# Altium PCB PCB.PcbDoc
Units mil, origin at the board's own origin, x right, y up, seen from the top; angles counter-clockwise.
Board outline 1968.5 x 2362.2 mil, 4 copper layers (Top Layer, Int1 (GND), Int2 (PWR), Bottom Layer), stack 61.811 mil thick; 15 components, 8 nets, 55 pads, 210 vias.
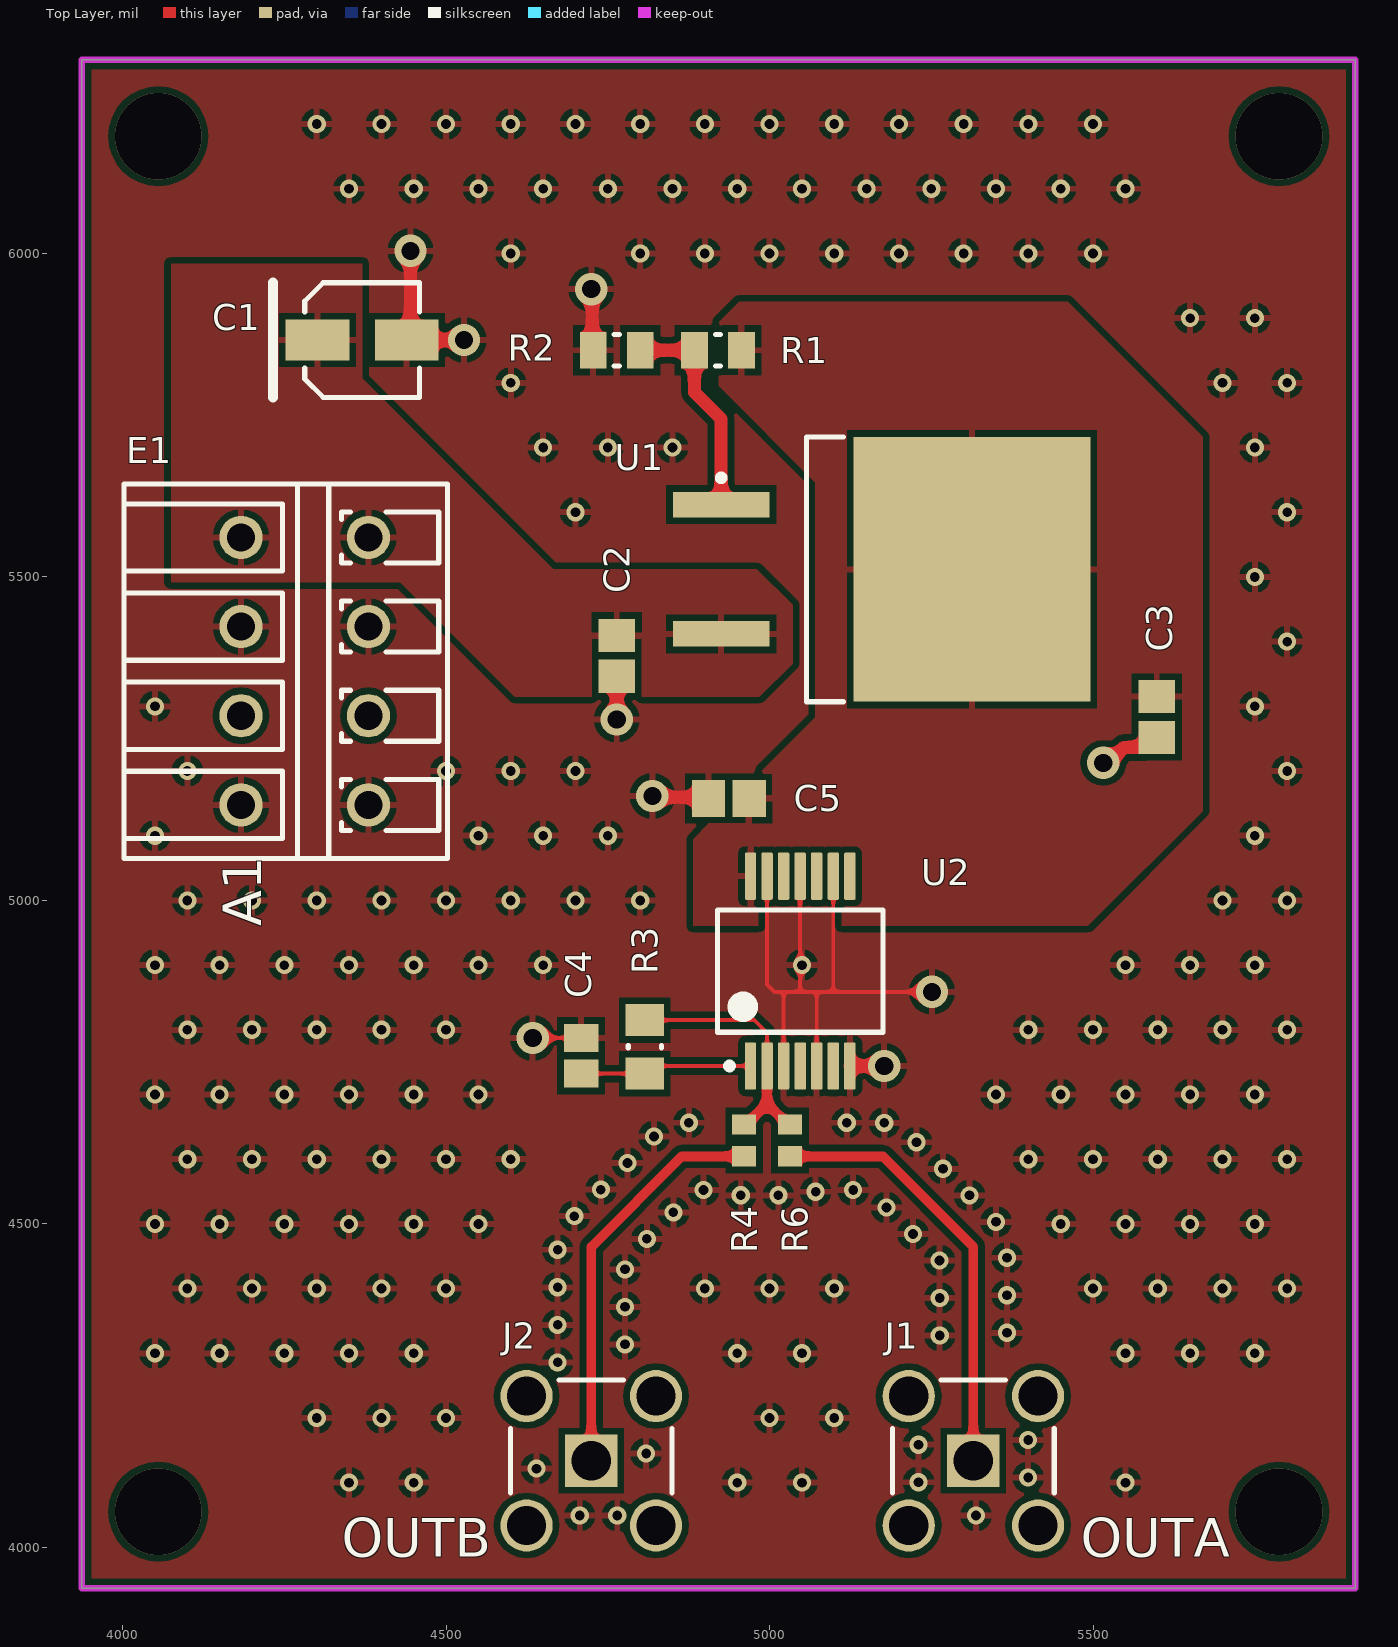
[diagram p0: Top Layer view]
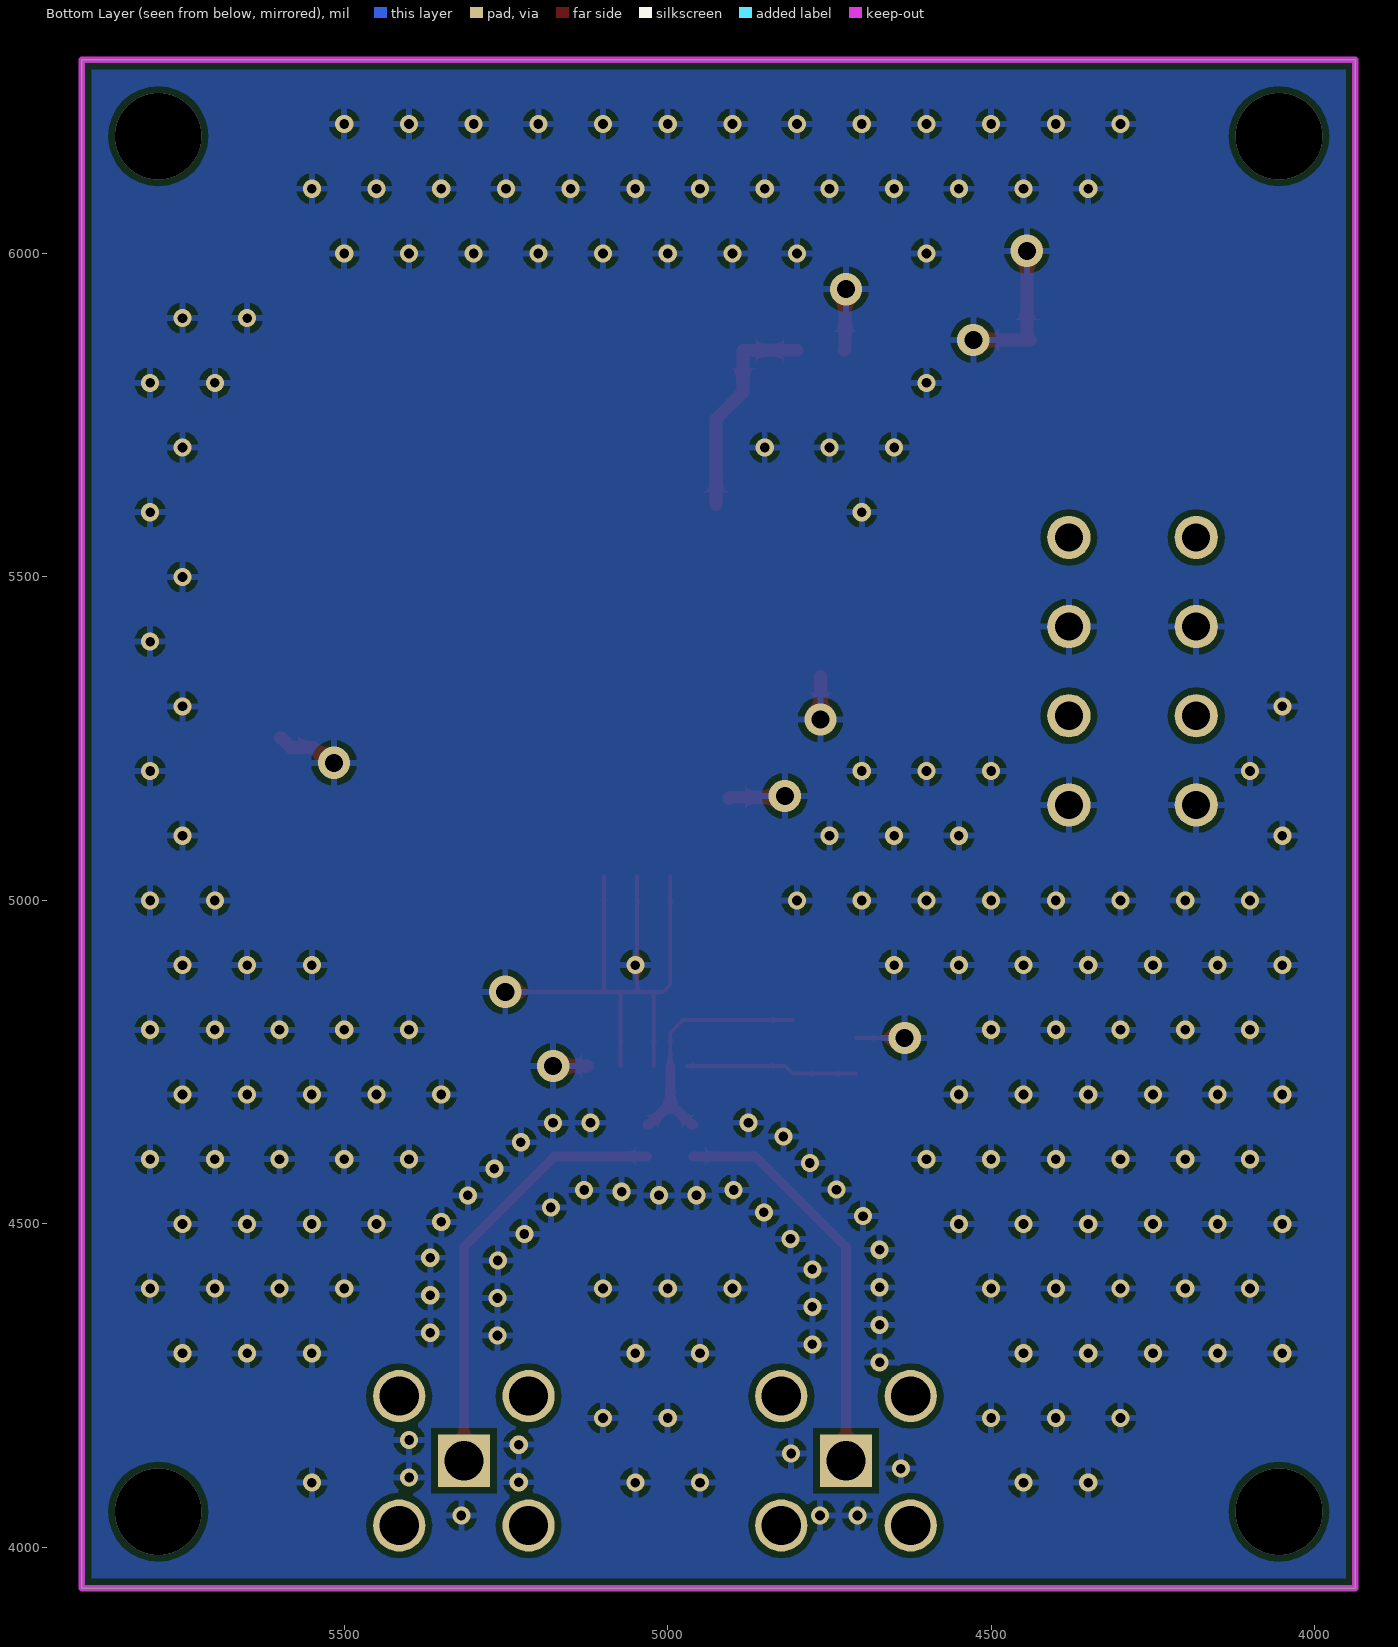
[diagram p1: Bottom Layer view, seen from below]
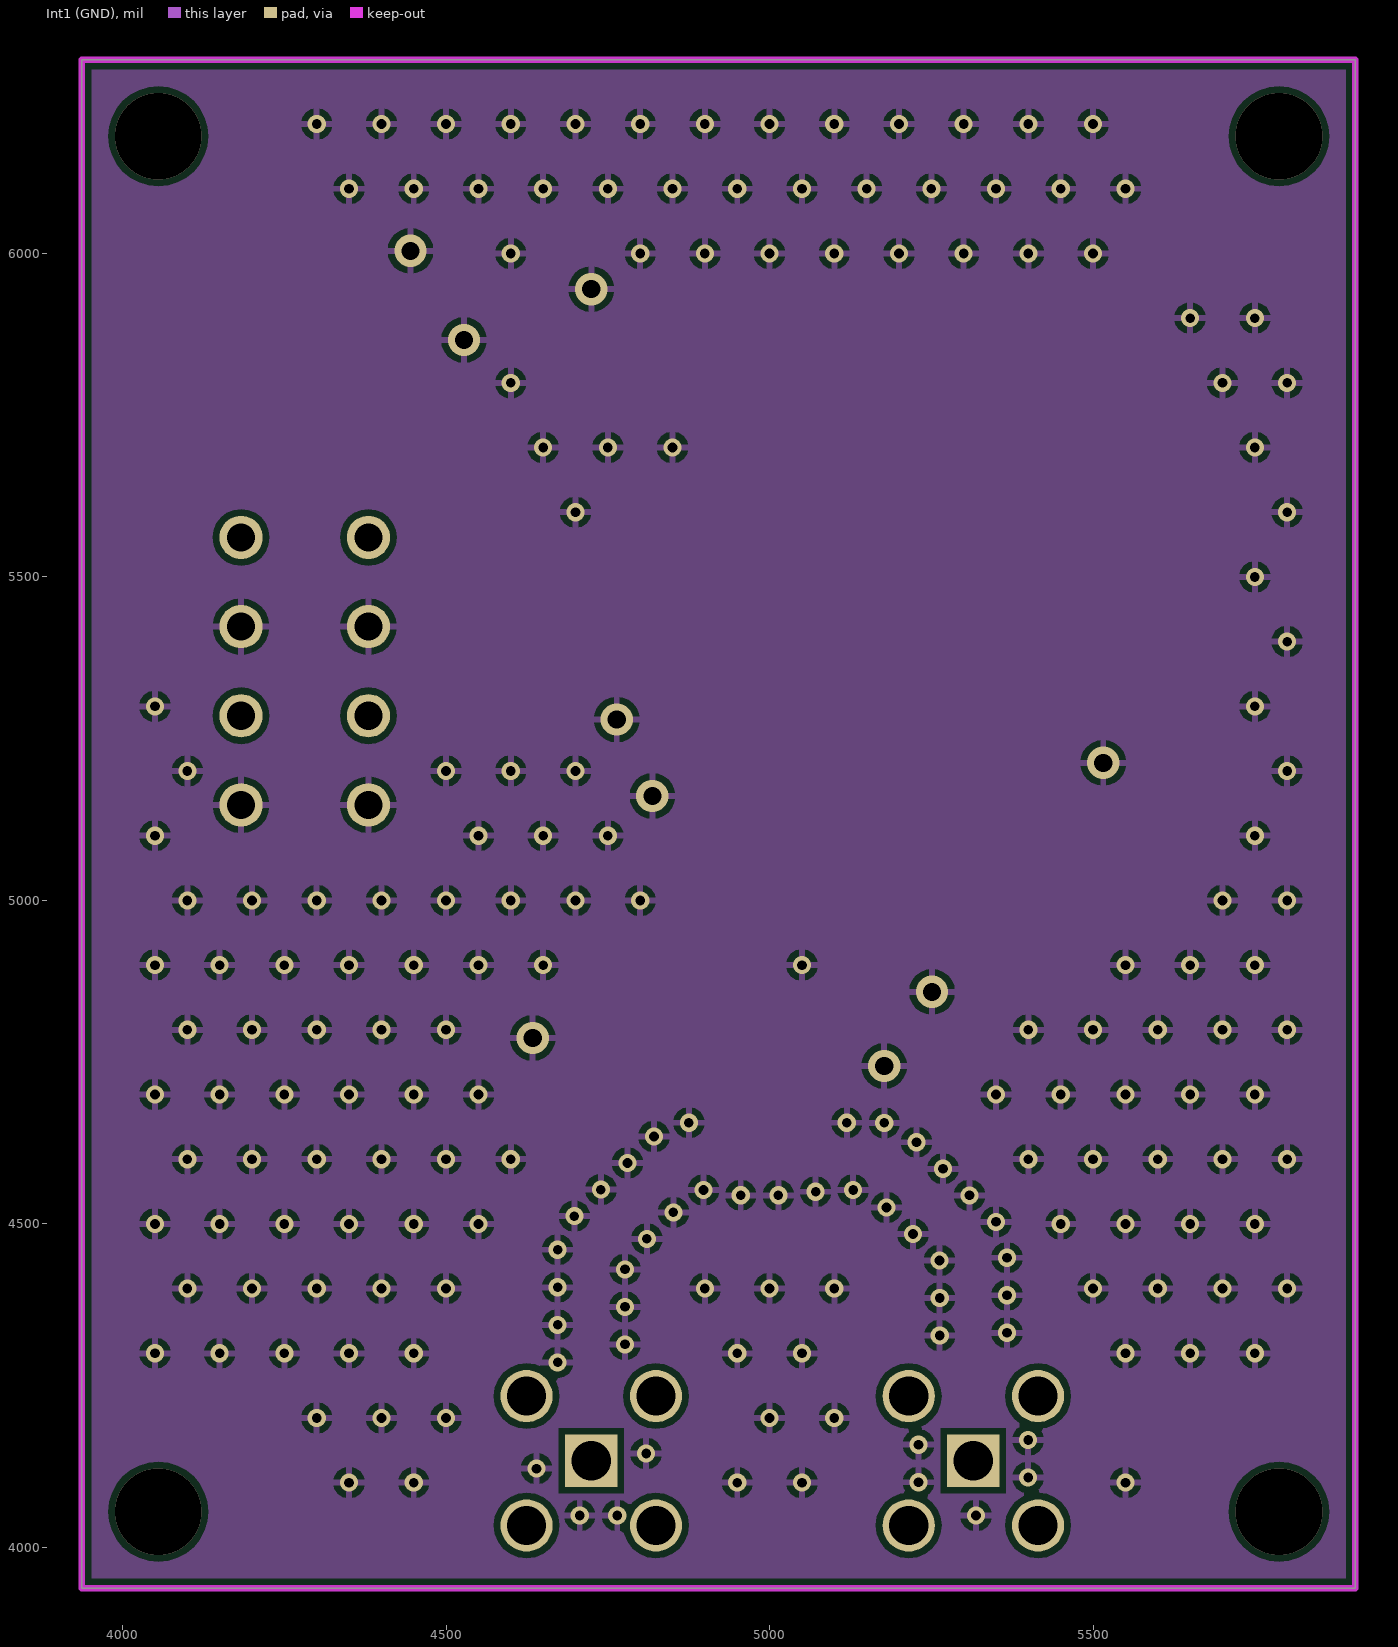
[diagram p2: Int1 (GND)]
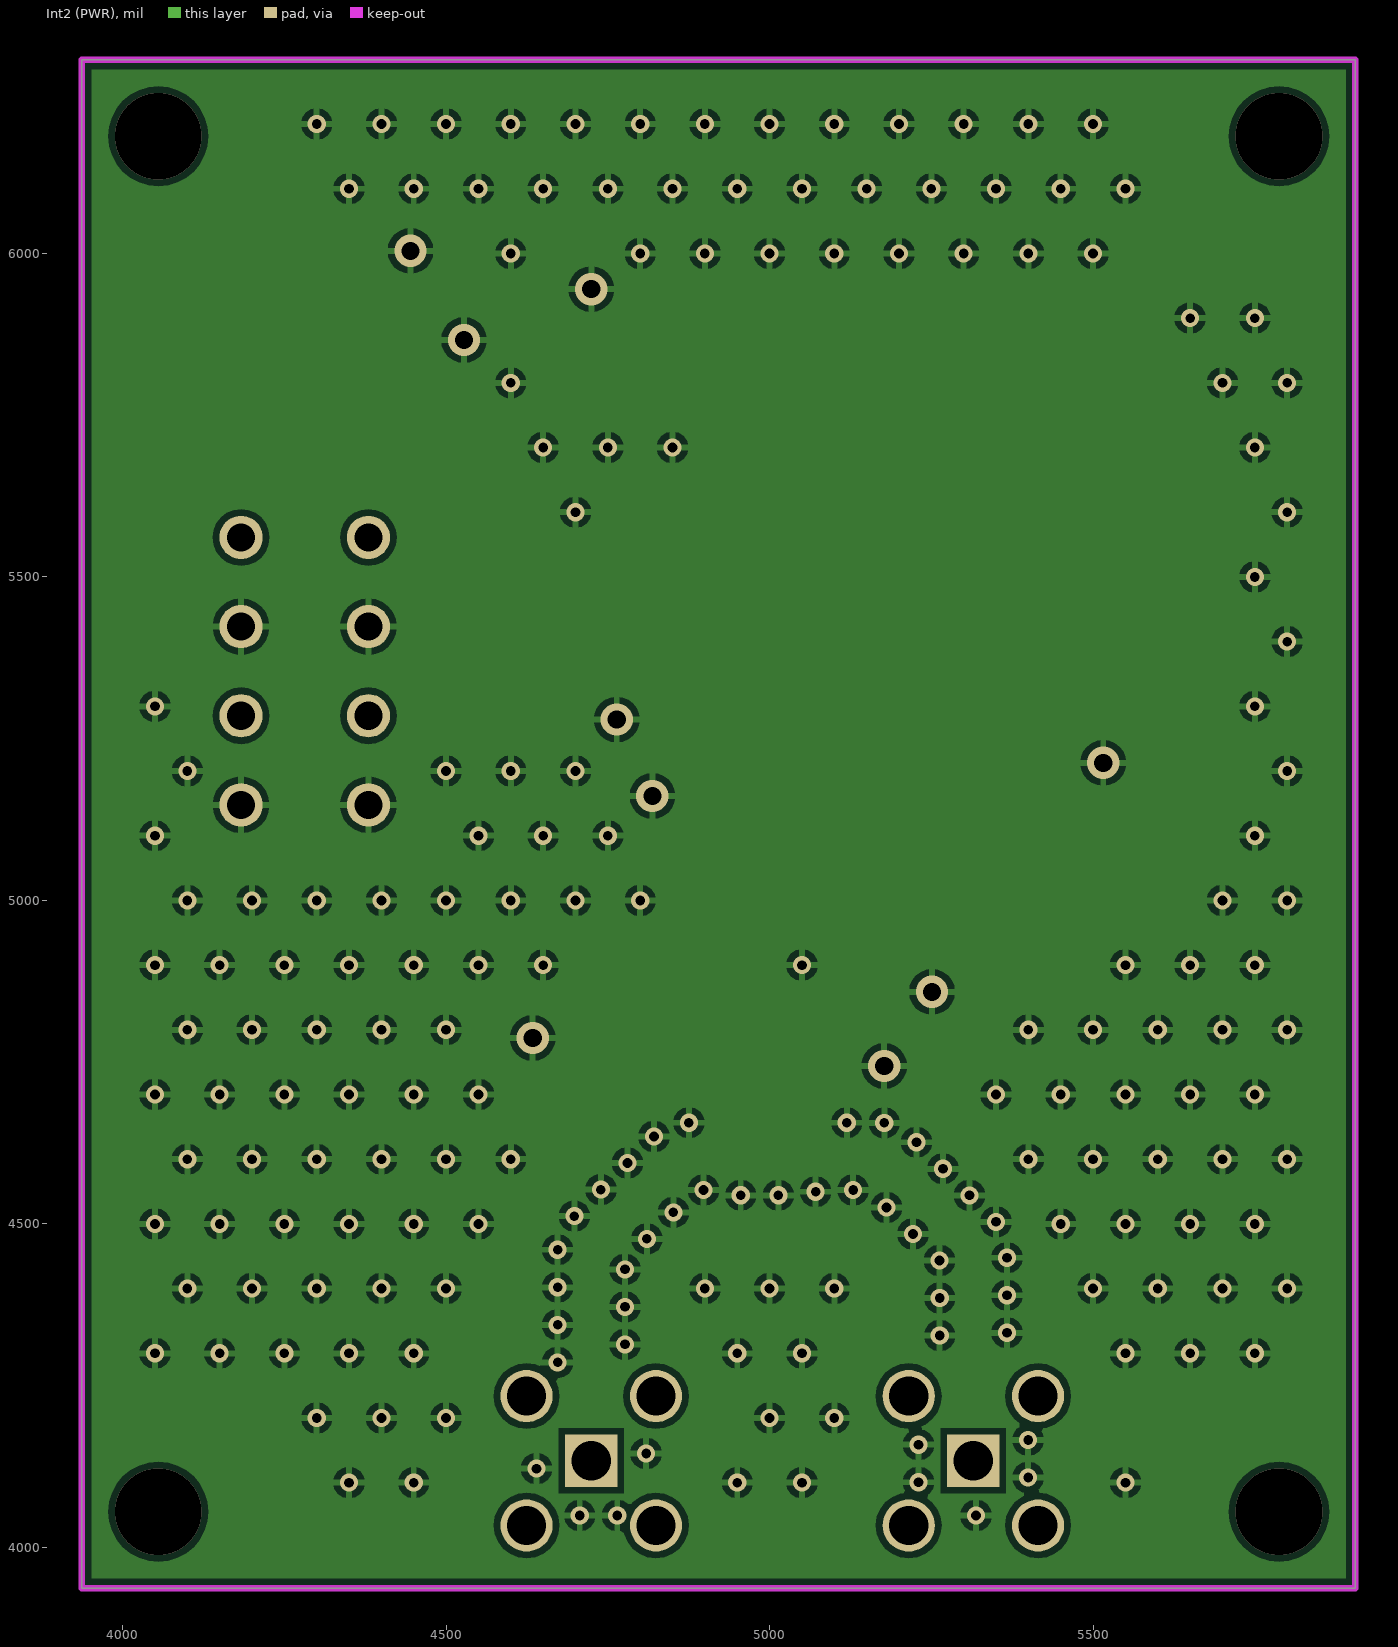
[diagram p3: Int2 (PWR)]

## Layer stack, top to bottom
Top Solder: solder mask 1, SM-001, Dk 4
Top Layer: signal copper 1.378
Dielectric 2: prepreg 7.874, PP-017, Dk 4.3
Int1 (GND): signal copper 0.689
Dielectric 3: core 41.929, Core-039, Dk 4.8
Int2 (PWR): signal copper 0.689
Dielectric 4: prepreg 7.874, PP-017, Dk 4.3
Bottom Layer: signal copper 1.378
Bottom Solder: solder mask 1, SM-001, Dk 4

## Board outline
3937.01,3937.01 5905.51,3937.01 5905.51,6299.21 3937.01,6299.21

## Design rules (kind name [scope] priority, off if disabled: settings)
Clearance Polygon_Clearance [InPolygon] p1: gap=10 ignorepadtopadclearanceinfootprint=FALSE
Clearance [All] p2: gap=6 ignorepadtopadclearanceinfootprint=FALSE
HoleSize [All] p1: absolutevalues=TRUE maxlimit=250 minlimit=1 maxpercent=80.000 minpercent=20.000
MinimumSolderMaskSliver [All] p1: minsoldermaskwidth=4
PolygonConnect [All] p1: connectstyle=Relief reliefconductorwidth=10 reliefentries=4 polygonreliefangle="90 Angle" airgapwidth=10
RoomDefinition PW [InComponentClass('PW')] p1 off: confinementstyle=ConfineIn formatcopy=TRUE lockcomponents=FALSE outline 0,0 2000,0 2000,1000 0,1000
RoomDefinition PS [InComponentClass('PS')] p2 off: confinementstyle=ConfineIn formatcopy=TRUE lockcomponents=FALSE outline 0,0 2000,0 2000,1000 0,1000
RoomDefinition CN [InComponentClass('CN')] p3 off: confinementstyle=ConfineIn formatcopy=TRUE lockcomponents=FALSE outline 0,0 2000,0 2000,1000 0,1000
RoutingVias [All] p1: holewidth=28 width=50 viastyle="Through Hole" minholewidth=28 minwidth=50 maxholewidth=28 maxwidth=50
SilkToSilkClearance [All] p1: silktosilkclearance=4
SilkToSolderMaskClearance [IsPad] p1: minsilkscreentomaskgap=4 clearancetoexposedcopper=TRUE
SolderMaskExpansion [All] p1: expansion=4 istentingtop=FALSE
Width [All] p1: maxlimit=100 minlimit=6 preferedwidth=10
26 further rules are at their usual default settings.

## Classes and differential pairs
component class PW: C1 C2 C3 R1 R2 U1
component class PS: C4 C5 R3 R4 R6 U2
component class CN: E1 J1 J2

## Components (designator, comment, footprint, x,y, rotation, side; value= is the part's Value field where it differs from the comment)
C1 "EEE-FK1V100UR" PNSC-FK-V-B_V 4370.08,5866.14 r0 top
C2 "1uF" CAPC2013X100X50NL20T25 4763.78,5377.95 r90 top
C3 "1uF" CAPC2013X100X50NL20T25 5598.43,5283.46 r90 top
C4 "10nF" CAPC2013X88X50LL20T25 4708.66,4759.84 r270 top
C5 "C0805C104K5RACTU" CAPC2013X88X50NL20T25 4937.01,5157.48 r0 top value=100n
E1 "1885200000" LSF_SMT_3_5_135_04 4251.97,5354.33 r90 top locked
J1 "OUTA" MOLX-731000114_V 5314.96,4133.86 r90 top locked
J2 "OUTB" MOLX-731000114_V 4724.41,4133.86 r90 top locked
R1 "CRCW080518K0FKEA" RESC2013X50X30NL20T20 4920.28,5850.39 r0 top
R2 "CRCW080511K0FKEA" RESC2013X50X30NL20T20 4763.78,5850.39 r0 top
R3 "1K 1% 0805(2012)" RESC0805(2012)_M 4807.09,4773.62 r90 top value="1000.00 Ohm"
R4 "50 ohm" RESC1609X50X30NL10T20 4960.63,4628.94 r270 top
R6 "50 ohm" RESC1609X50X30NL10T20 5031.5,4628.94 r270 top
U1 "LM317D2T-TR" TO-263_N 5173.23,5511.81 r0 top
U2 "SN74LVC14ADBR" DB0014A_M 5047.24,4890.75 r90 top

## Footprints (in the part's own frame and the unit in brackets; to place one, negate y for a bottom-side part, rotate by r counter-clockwise, add the part's x,y. Pads: shape width x height; smd on the part's side, far side on the other; paste and mask are expansions set on the pad)
CAPC2013X88X50LL20T25 [mm] "Chip Capacitor, 2-Leads, Body 2.00x1.25mm, IPC High Density"
  rect 1.1x1.35 smd: 1(-0.7,0) 2(0.7,0)
  body extent -1.1,-0.72 1.1,0.72, height 0.88
CAPC2013X88X50NL20T25 [mm] "Chip Capacitor, 2-Leads, Body 2.00x1.25mm, IPC Medium Density"
  rect 1.3x1.45 smd: 1(-0.8,0) 2(0.8,0)
  body extent -1.1,-0.72 1.1,0.72, height 0.88
CAPC2013X100X50NL20T25 [mm] "Chip Capacitor, 2-Leads, Body 2.00x1.25mm, IPC Medium Density"
  rect 1.3x1.45 smd: 1(-0.8,0) 2(0.8,0)
  body extent -1.1,-0.72 1.1,0.72, height 1
DB0014A_M [mm] "SOP, 14-Leads, Body 5.6x6.5mm, Pitch 0.65mm, IPC Low Density"
  rrect22% 1.85x0.45 smd: 1(-3.725,1.95) 2(-3.725,1.3) 3(-3.725,0.65) 4(-3.725,0) 5(-3.725,-0.65) 6(-3.725,-1.3) 7(-3.725,-1.95) 8(3.725,-1.95) 9(3.725,-1.3) 10(3.725,-0.65) 11(3.725,0) 12(3.725,0.65) 13(3.725,1.3) 14(3.725,1.95)
  silkscreen extent -3.85,-3.25 2.4,3.25, body extent -3.91,-3.1 3.91,3.1, height 2
LSF_SMT_3_5_135_04 [mm] "OMNIMATE Signal - Serie LSF  LSF-SMT 3.50/04/135 1.5"
  round 1.7 hole 1.1: A1(-5.25,-3.25) A1(-5.25,1.75) A2(-1.75,1.75) A2(-1.75,-3.25) A3(1.75,1.75) A3(1.75,-3.25) A4(5.25,-3.25) A4(5.25,1.75)
  silkscreen extent -7.35,-6.35 7.35,6.35, body extent -7.35,-6.35 7.35,6.35, height 13.17
MOLX-731000114_V [mm] "Connector, 5-Leads, Body 14.8x6.35mm, Pitch 2.54mm"
  rect 2.05x2.05 hole 1.54: 1(0,0)
  round 2.05 hole 1.54: 2(-2.54,2.54) 3(-2.54,-2.54) 4(2.54,-2.54) 5(2.54,2.54)
  silkscreen extent -1.26,-3.17 3.17,3.17, body extent -11.62,-3.17 3.18,3.18, height 9.57
PNSC-FK-V-B_V [mm] "CAPAE, 2-Leads, Body 4.50x4.50mm"
  rect 2.5x1.6 smd: 1(-1.75,0) 2(1.75,0)
  silkscreen extent -3.5,-2.25 2.25,2.25, body extent -2.75,-2.25 2.75,2.25, height 6.1
RESC0805(2012)_M [mm] "Chip Resistor, Body 2.0x1.3mm, IPC Low Density"
  rect 1.25x1.5 smd: 1(-1.05,0) 2(1.05,0)
  silkscreen extent -0.05,-0.65 0.05,0.65, body extent -1.1,-0.67 1.1,0.67, height 0.7
RESC1609X50X30NL10T20 [mm] "Chip Resistor, 2-Leads, Body 1.55x0.85mm, IPC Medium Density"
  rect 0.8x0.95 smd: 1(-0.625,0) 2(0.625,0)
  body extent -0.82,-0.48 0.82,0.48, height 0.5
RESC2013X50X30NL20T20 [mm] "Chip Resistor, 2-Leads, Body 2.00x1.25mm, IPC Medium Density"
  rect 1.05x1.45 smd: 1(-0.925,0) 2(0.925,0)
  silkscreen extent -0.1,-0.63 0.1,0.63, body extent -1.1,-0.72 1.1,0.72, height 0.5
TO-263_N [mm] "D2-PAK, 4-Leads, Body 9.2x10.2mm, Pitch 2.54mm, Lead Span 15.4mm, IPC Medium Density"
  rect 3.8x1 smd: 1(-6.3,2.54) 3(-6.3,-2.54)
  rect 9.3x10.4 smd: 4(3.55,0)
  silkscreen extent -6.42,-5.2 -1.5,5.2, body extent -2.95,-5.2 6.4,5.2, height 4.6

## Part data
C1: library part CMP-2000-06211-1, "Aluminum Electrolytic Capacitor, 10 uF, +/- 20%, 35 V, 2-Pin SMD (Size Code B), -55 to 105 degC, RoHS, Tape and Reel", Capacitance=10µF, Case Size/Dimension=Ø4x5.8mm, Lifetime@Temperature=2000Hrs@105°C, Manufacturer=Panasonic, Operating Temp Range=-55to+105°C, Operating Temp-Max=105°C, Package Description="2-Pin Electrolytic Aluminum Capacitor, Body 4.3 x 4.3 mm", Package Reference=FK-V-B, Rated Voltage=35V, Ripple Current=90mA, Datasheet URL=http://industrial.panasonic.com/cdbs/www-data/pdf/RDE0000/ABA0000C1181.pdf, Datasheet Version=03/2016, Impedance=1.35O, Manufacturer URL=http://www.panasonic.com/, Mounting Technology=SurfaceMount, Package URL=http://industrial.panasonic.com/cdbs/www-data/pdf/RDE0000/DME0000COL48.pdf, Series=FK, Type=Can
C2 C3: library part CMP-2007-03716-1, Manufacturer=Kemet, Part Number=C0805X105K3RACTU
C4: library part CMP-2007-00493-1, Manufacturer=Kemet, Part Number=C0805C103J3GACTU
C5: library part CMP-2007-00279-1, Manufacturer=Kemet, Part Number=C0805C104K5RACTU
E1: library part CMP-1559-02099-1, "OMNIMATE Signal - series LSF", Colour=Black, Manufacturer=Weidmueller, Rated_current_min_no_of_poles_TU_20_deg_C="19 A", Rated_current_use_group_B_UL_1059="12 A", Rated_voltage_for_surge_voltage_class_pollution_degree_II_2="320 V", Rated_voltage_use_group_B_UL_1059="300 V", UL_94_flammability_rating=V-0, ComponentLink1Description="Manufacturer URL", ComponentLink1URL=http://www.weidmueller.com/, ComponentLink2Description="URL Link1", ComponentLink2URL=http://catalog.weidmueller.com/catalog/Start.do?localeId=en&ObjectID=1885200000, Contact_material=Cu-Leg, Contact_surface=tinned, Insulating_material="LCP GF", Mounting_onto_the_PCB="Reflow solder connection", No_of_poles=4, PackageReference=LSF_SMT_3_5_135_04, Packaging=Tube, PartNumber=1885200000, Pitch_inch="0,138 inch", Pitch_mm="3,5 mm", Qty="37 PCS", Revision=V1, Short_text_for_material="LSF-SMT 3.50/04/135 1.5SN BK TU", Side_termination_characteristic="closed side", Solder_pin_length_mm="1,5 mm", Solid_max_H05_07_V_U="1,5 mm²", Solid_min_H05_07_V_U="0,2 mm²", Wire_cross_section_AWG_max_UL_1059="AWG 16", Wire_cross_section_AWG_min_UL_1059="AWG 24"
J1 J2: library part CMP-2000-05487-1, "SMA Right-Angle PCB Jack Receptacle, Brass Body, Gold Plated, 50 Ohm, 5-Pin THD, RoHS, Tray", Manufacturer=Molex, Package Description="5-Pin Through Hole Device, Body 14.8 x 6.35 mm, Pitch 2.54 mm", Package Reference=731000114, Datasheet URL=http://www.molex.com/webdocs/datasheets/pdf/en-us/0731000114_RF_COAX_CONNECTORS.pdf, Datasheet Version=09/2016, Manufacturer URL=http://www.molex.com/, Mounting Technology=ThroughHole, Package URL=http://www.molex.com/pdm_docs/sd/731000114_sd.pdf
R1: library part CMP-2001-03588-1, Manufacturer="Vishay Dale", Part Number=CRCW080518K0FKEA
R2: library part CMP-2001-04924-1, Manufacturer="Vishay Dale", Part Number=CRCW080511K0FKEA
R3: library part CMP-1013-00510-1, "1K 0.125W 1% 0805 (2012 Metric)  SMD", Case-EIA=0805, Case-Metric=2012, Power="0.125 W", Tolerance="1 %", Technology=SMT
R4 R6: library part CMP-2000-03436-1, Manufacturer="Vishay Dale", Part Number=CRCW060350R0FKEA
U1: library part CMP-0244-00094-1, "1.5A, 1.2V to 37V Adjustable Voltage Regulator, 3-Pin D2PAK, Tape and Reel", ComponentLink1Description="Manufacturer URL", ComponentLink1URL=http://www.st.com, ComponentLink2Description=Datasheet, ComponentLink2URL=http://www.st.com/internet/com/TECHNICAL_RESOURCES/TECHNICAL_LITERATURE/DATASHEET/CD00000455.pdf, DatasheetVersion=1/11/2011, PackageDescription="3-Pin Transistor Outline Package 2.54 mm Pitch, 15.4 mm Lead Span (D2PAK)", PackageReference=TO-263, PackageVersion=2011
U2: library part CMP-1615-00327-3, "Hex Schmitt-Trigger Inverter, DB0014A, LARGE T&R", F @ Nom Voltage(Max)(Mhz)=100, Generic Part Number=SN74LVC14A, ICC @ Nom Voltage(Max)(mA)=0.01, Manufacturer="Texas Instruments", Operating Temperature Range(C)="-40 to 125", Rating=Catalog, tpd @ Nom Voltage(Max)(ns)=11,7.8,7.5,6.4, Voltage(Nom)(V)=1.8,2.5,2.7,3.3, Bits(#)=6, Code_JEDEC=MO-150, DatasheetVersion=SCAS285AA, Input Type=CMOS,TTL, Output Drive (IOL/IOH)(Max)(mA)=-24/24, Output Type=CMOS, PackageReference=DB0014A, Schmitt Trigger=Yes, Technology Family=LVC, VCC(Max)(V)=3.6, VCC(Min)(V)=2

## Via types
v1: diameter 28, hole 15, Top Layer to Bottom Layer, 197 vias
v2: diameter 50, hole 28, Top Layer to Bottom Layer, 9 vias
v3: diameter 133.86, hole 133.86, Top Layer to Bottom Layer, 4 vias

## Nets (pads, with @x,y where several pads share a name; then routed paths per layer and width w, separated by ;. In a path a pad name is that pad's centre, name@x,y a point inside that pad or via, vN(x,y) a via of type N, cw(c..) or ccw(c..) an arc to the next point about the centre after c; other vN are vias at no path point)
+3V3: C3.2 C5.2 R1.2 U1.4 U2.14
+6V: C1.1 C2.2 E1.A4 U1.3
GND: C1.2 C2.1 C3.1 C4.1 C5.1 E1.A1 E1.A3 R2.1 U2.3 U2.5 U2.7 U2.9 U2.11 U2.13 | length 1720.3
  Top Layer w6: v2(4633.86,4787.4) C4.1 ; U2.13 4996.06,4870.08 5007.49,4858.65 5021.65,4858.65 ; U2.3 5021.65,4858.65 ; U2.11 5047.24,4858.65 ; U2.5 5072.83,4858.65 ; U2.9 5098.43,4858.65 ; v2(5251.09,4858.65) 5098.43,4858.65 ; 5021.65,4858.65 5047.24,4858.65 ; 5047.24,4858.65 5072.83,4858.65 ; 5072.83,4858.65 5098.43,4858.65
  Top Layer w20: v2(4444.88,6003.94) 4444.88,5872.05 C1.2 v2(4527.56,5866.14) ; v2(4724.41,5944.88) 4725.89,5943.41 4725.89,5851.87 R2.1 ; v2(4763.78,5279.53) C2.1 ; v2(4818.9,5161.42) 4820.87,5159.45 4903.54,5159.45 C5.1 ; U2.7 v2(5177.17,4744.09) ; v2(5515.75,5212.6) 5523.87,5212.6 5547.65,5236.38 5582.83,5236.38 C3.1
  other v1: 4706.56,4049.12 4764.56,4049.12 5318.96,4049.12 4350,4100 4450,4100 4950,4100 5050,4100 5550,4100 5230.23,4100.67 5399.69,4107.97 4639.68,4121.65 4809.14,4145.19 5230.23,4158.67 5399.69,4165.97 4300,4200 4400,4200 4500,4200 5000,4200 5100,4200 4672.38,4286.02 4050,4300 4150,4300 4250,4300 4350,4300 4450,4300 4950,4300 5050,4300 5550,4300 5650,4300 5750,4300 4776.44,4313.8 5262.93,4327.37 5366.99,4331.7 4672.38,4344.02 4776.44,4371.8 5262.93,4385.37 5366.99,4389.7 4100,4400 4200,4400 4300,4400 4400,4400 4500,4400 4900,4400 5000,4400 5100,4400 5500,4400 5600,4400 5700,4400 5800,4400 4672.38,4402.02 4776.44,4429.8 5262.58,4443.37 5366.99,4447.7 4672.38,4460.02 4810.3,4476.88 5221.57,4484.38 4050,4500 4150,4500 4250,4500 4350,4500 4450,4500 4550,4500 5450,4500 5550,4500 5650,4500 5750,4500 5349.96,4503.14 4698.22,4511.95 4851.31,4517.9 5180.56,4525.39 4955.44,4544.2 5013.5,4544.2 5308.95,4544.15 5071.24,4549.67 4898.01,4552.3 5129.18,4552.3 4739.23,4552.96 5267.94,4585.17 4780.24,4593.98 4100,4600 4200,4600 4300,4600 4400,4600 4500,4600 4600,4600 5400,4600 5500,4600 5600,4600 5700,4600 5800,4600 5226.93,4626.18 4821.25,4634.99 4875.18,4656.36 5119.31,4656.36 5177.31,4656.21 4050,4700 4150,4700 4250,4700 4350,4700 4450,4700 4550,4700 5350,4700 5450,4700 5550,4700 5650,4700 5750,4700 4100,4800 4200,4800 4300,4800 4400,4800 4500,4800 5400,4800 5500,4800 5600,4800 5700,4800 5800,4800 4050,4900 4150,4900 4250,4900 4350,4900 4450,4900 4550,4900 4650,4900 5050,4900 5550,4900 5650,4900 5750,4900 4100,5000 4200,5000 4300,5000 4400,5000 4500,5000 4600,5000 4700,5000 4800,5000 5700,5000 5800,5000 4050,5100 4550,5100 4650,5100 4750,5100 5750,5100 4100,5200 4500,5200 4600,5200 4700,5200 5800,5200 4050,5300 5750,5300 5800,5400 5750,5500 4700,5600 5800,5600 4650,5700 4750,5700 4850,5700 5750,5700 4600,5800 5700,5800 5800,5800 5650,5900 5750,5900 4600,6000 4800,6000 4900,6000 5000,6000 5100,6000 5200,6000 5300,6000 5400,6000 5500,6000 4350,6100 4450,6100 4550,6100 4650,6100 4750,6100 4850,6100 4950,6100 5050,6100 5150,6100 5250,6100 5350,6100 5450,6100 5550,6100 4300,6200 4400,6200 4500,6200 4600,6200 4700,6200 4800,6200 4900,6200 5000,6200 5100,6200 5200,6200 5300,6200 5400,6200 5500,6200
NetC4_2: C4.2 R3.1 U2.1 | length 266.7
  Top Layer w6: C4.2 R3.1 4818.9,4744.09 U2.1
NetJ1_1: J1.1 R6.2 | length 672.1
  Top Layer w15: R6.2 5175.2,4604.33 5314.96,4464.57 J1.1
NetJ2_1: J2.1 R4.2 | length 624.8
  Top Layer w15: J2.1 4724.41,4464.57 4864.17,4604.33 R4.2
NetR1_1: R1.1 R2.2 U1.1 | length 339.4
  Top Layer w20: R2.2 R1.1 4883.86,5785.43 4925.2,5744.09 U1.1
NetR3_2: R3.2 R4.1 R6.1 U2.2 | length 404.2
  Top Layer w6: R3.2 4976.38,4814.96 4996.06,4795.28 U2.2
  Top Layer w15: R4.1 4963.58,4653.54 4996.06,4686.02 ; U2.2 4996.06,4686.02 ; R6.1 5028.54,4653.54 4996.06,4686.02
pads on no net: E1.A2 J1.2 J1.3 J1.4 J1.5 J2.2 J2.3 J2.4 J2.5 U2.4 U2.6 U2.8 U2.10 U2.12
copper on no net:
  other v3: 4055.12,4055.12 5787.4,4055.12 4055.12,6181.1 5787.4,6181.1

## Polygon pours and split planes (outlines as drawn)
GND on Int1 (GND) "GND_L02_P000" (solid, pour order 0): 3937.01,3937.01 3937.01,6299.21 5905.51,6299.21 5905.51,3937.01
GND on Int2 (PWR) "GND_L03_P001" (solid, pour order 1): 3937.01,3937.01 3937.01,6299.21 5905.51,6299.21 5905.51,3937.01
GND on Top Layer "GND_L01_P004" (solid, pour order 4): 3937.01,3937.01 3937.01,6299.21 5905.51,6299.21 5905.51,3937.01
+3V3 on Top Layer "+3V3_L01_P003" (solid, pour order 3): 4881.89,4960.63 5492.13,4960.63 5669.29,5137.8 5669.29,5716.54 5460.63,5925.2 4952.76,5925.2 4921.26,5893.7 4921.26,5795.28 5070.87,5645.67 5070.87,5283.46 4881.89,5094.49
+6V on Top Layer "+6V_L01_P002" (solid, pour order 2): 4074.8,5492.13 4074.8,5984.25 4370.08,5984.25 4370.08,5807.09 4665.35,5511.81 4980.31,5511.81 5035.43,5456.69 5035.43,5366.14 4984.25,5314.96 4606.3,5314.96 4429.13,5492.13
GND on Bottom Layer "GND_L04_P006" (solid, pour order 6): 3937.01,3937.01 3937.01,6299.21 5905.51,6299.21 5905.51,3937.01

## Keep-outs
Keep-Out Layer:
  the board outline again, w10

## Silkscreen, mask and mechanical layers (free items; w line width, h text height)
Mechanical 1:
  text "Via Stitching calcs: 8GHz wavelength = 37.5mm" at 6102.36,4413.53 h39.37
  text "50 Ohm Coplanar waveguide calcs (from Saturn): / - Width: 15mils / - Conductor Gap: 10mil" at 4330.71,3074.95 h39.37

## Dimensions
4724.41,4133.86 to 5314.96,4133.86 on Mechanical 1

## Text inside footprints (layer, text, board x,y; h text height)
E1: Top Overlay "A1" at 4214.37,4960.16 h59.06 r90